# Altium PCB CONTROLER.PcbDoc
Units mm, origin at the board's own origin, x right, y up, seen from the top; angles counter-clockwise.
Board outline 82.3 x 80.9 mm, 2 copper layers (Top Layer, Bottom Layer); 48 components, 51 nets, 196 pads, 56 vias.
Unrouted connection lines stored in the file: 1.
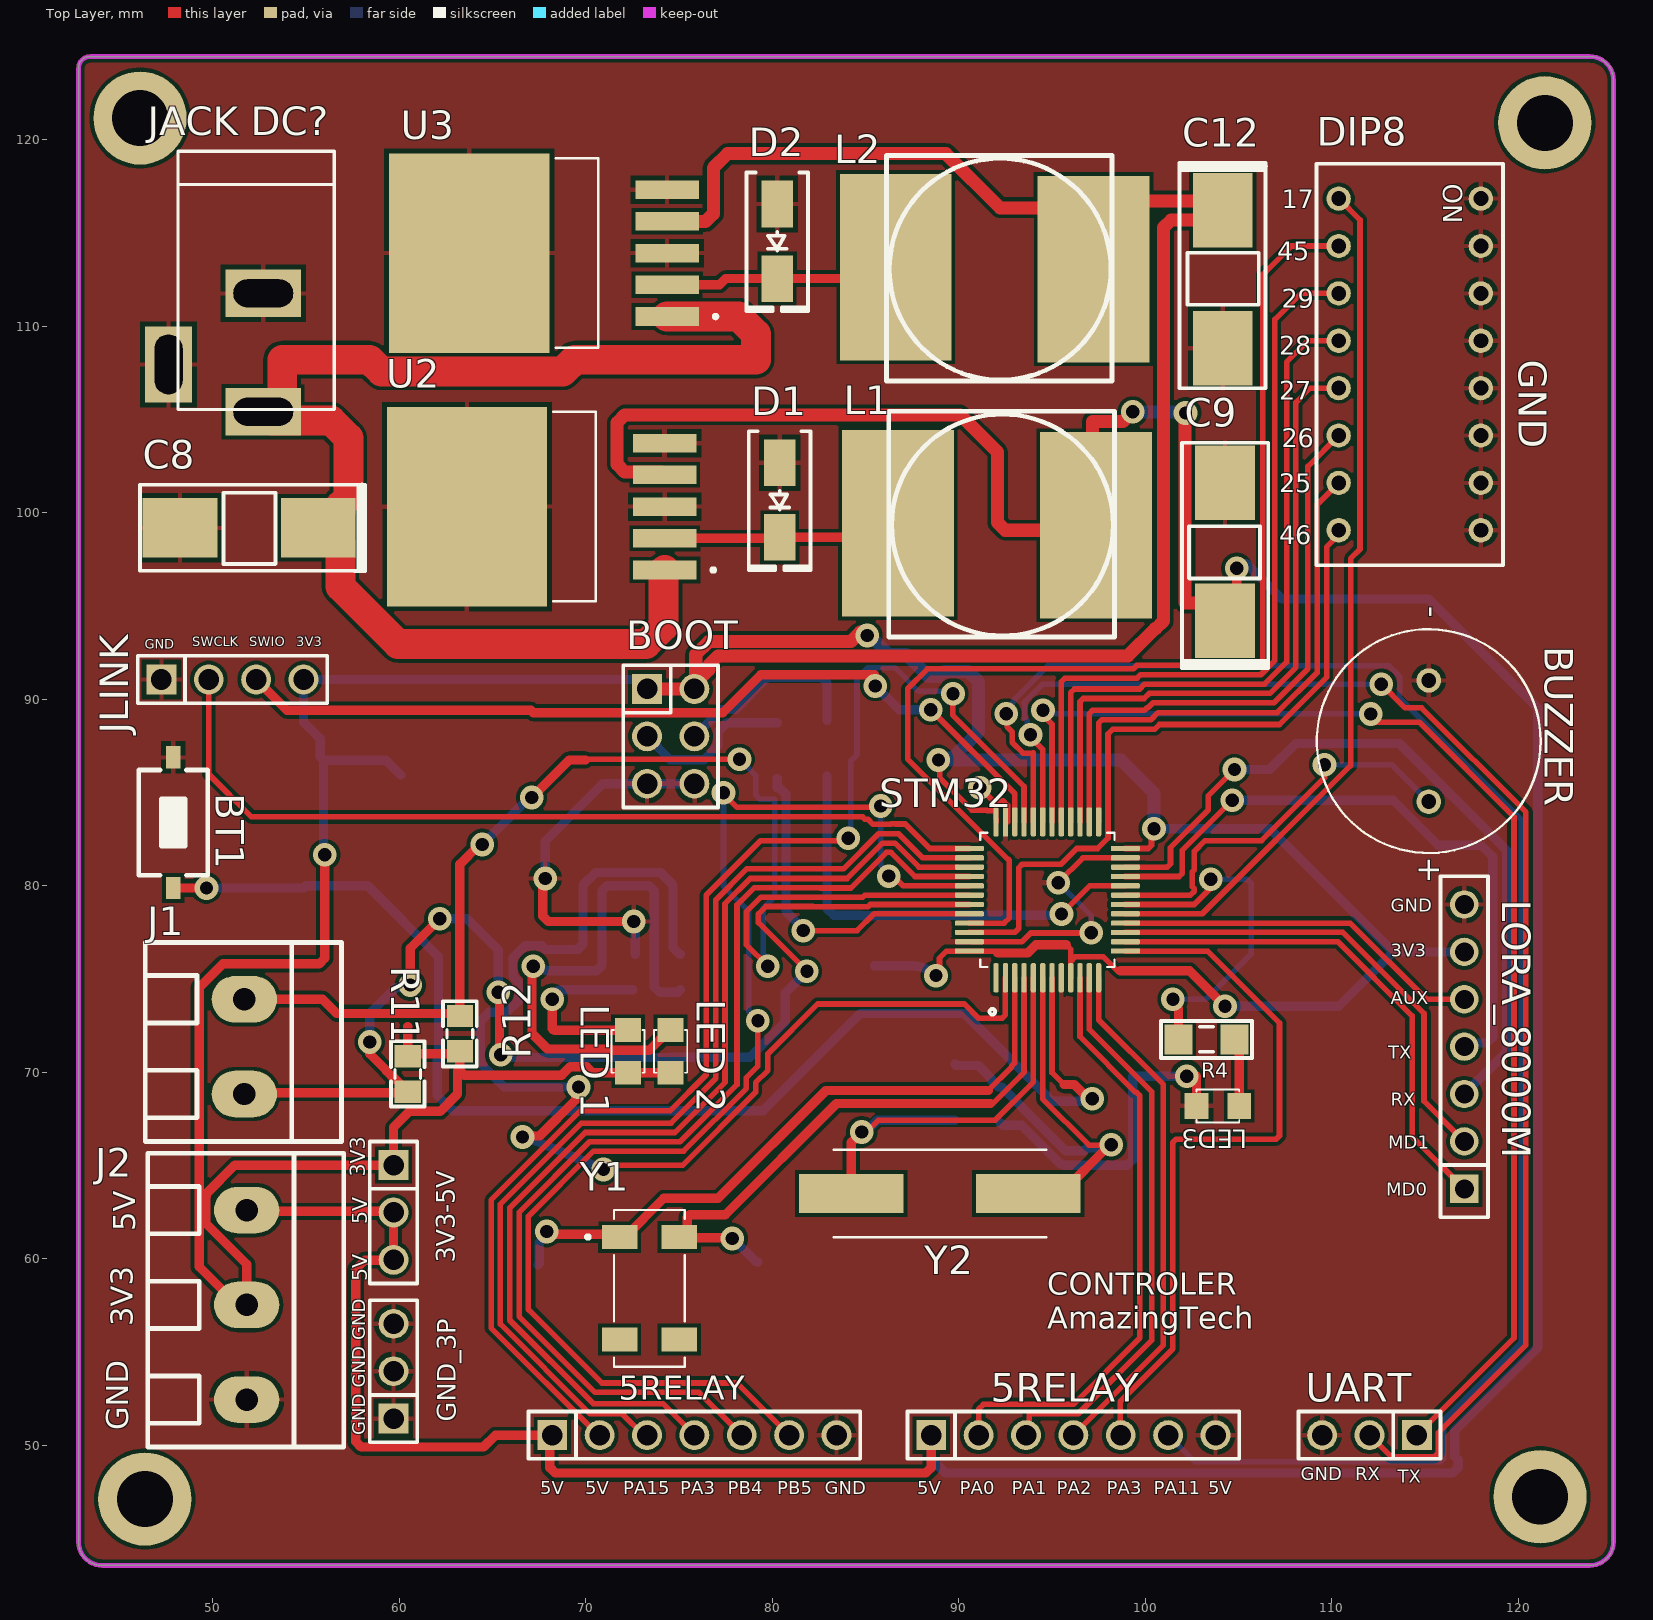
[diagram p0: Top Layer view]
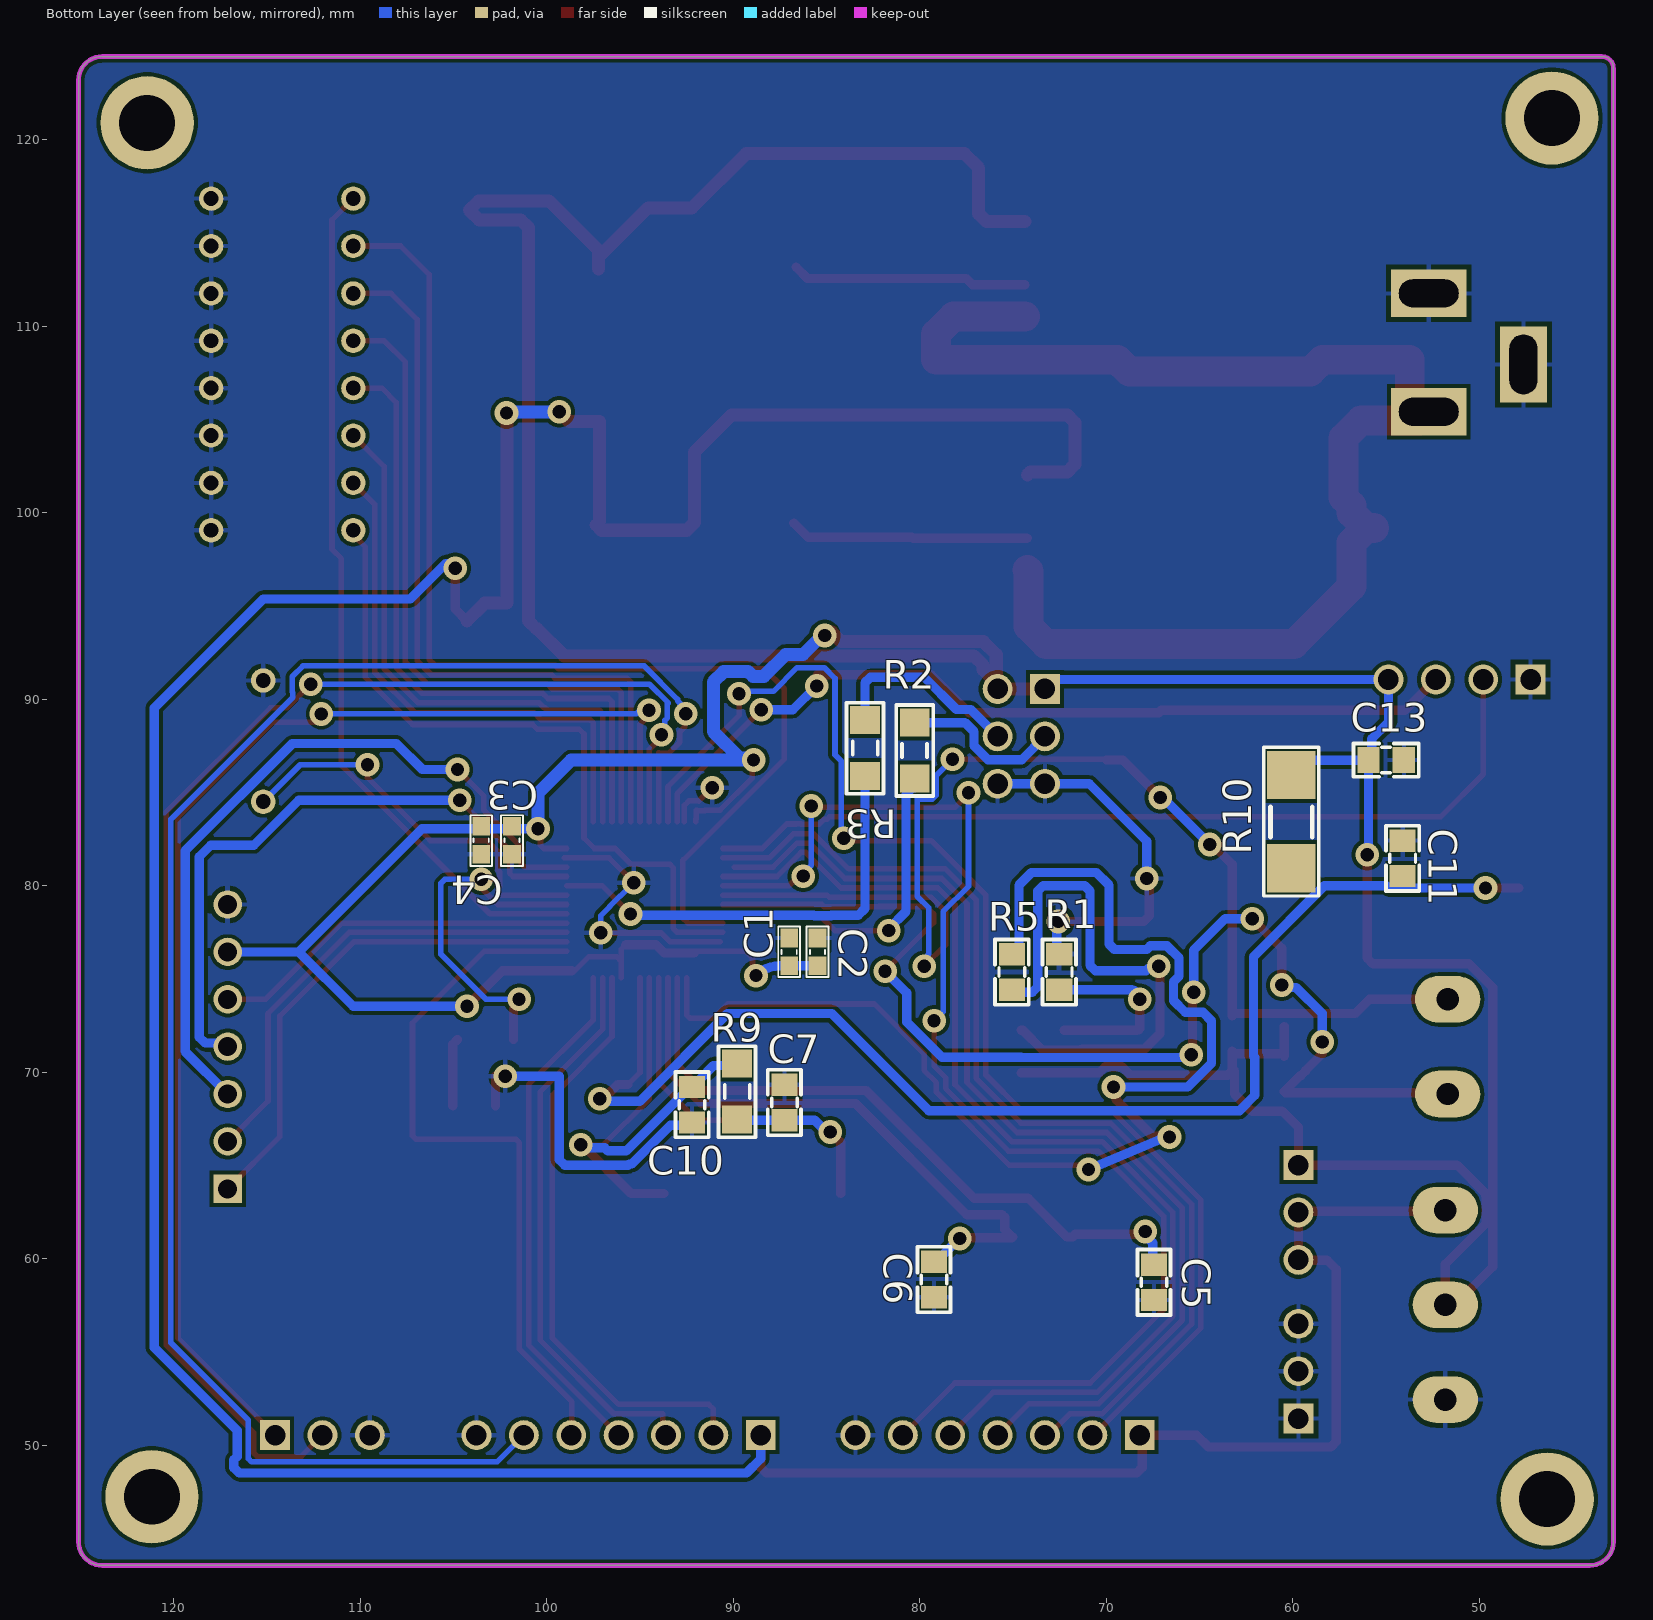
[diagram p1: Bottom Layer view, seen from below]

## Layer stack, top to bottom
Top Solder: solder mask 0.0102, Solder Resist, Dk 3.5
Top Layer: signal copper 0.0356
Dielectric 1: dielectric 0.32, FR-4, Dk 4.8
Bottom Layer: signal copper 0.0356
Bottom Solder: solder mask 0.0102, Solder Resist, Dk 3.5

## Board outline
42.799,44.831 42.799,123.825 cw(c43.434,123.825) 43.434,124.46 123.825,124.46 cw(c123.825,123.19) 125.095,123.19 125.095,44.831 cw(c123.825,44.831) 123.825,43.561 44.069,43.561 cw(c44.069,44.831)

## Design rules (kind name [scope] priority, off if disabled: settings)
Clearance [All] p1: gap=0.2 ignorepadtopadclearanceinfootprint=FALSE
PolygonConnect [All] p1: connectstyle=Relief reliefconductorwidth=0.254 reliefentries=4 polygonreliefangle="90 Angle" airgapwidth=0.254
RoutingVias [All] p1: holewidth=0.711 width=1.27 viastyle="Through Hole" minholewidth=0.711 minwidth=1.27 maxholewidth=0.711 maxwidth=1.27
SolderMaskExpansion [All] p1: expansion=0.102 istentingtop=FALSE
Width [All] p1: maxlimit=1.6 minlimit=0.3 preferedwidth=0.5
30 further rules are at their usual default settings.

## Components (designator, comment, footprint, x,y, rotation, side; value= is the part's Value field where it differs from the comment)
3V3-5V "3V3-5V" "JP 1x3 DT" 59.69,65.024 r270 top
5RELAY "5_RELAY" "JP 1x7 DT" 88.519,50.546 r0 top (schematic designator JP?)
5RELAY "5_RELAY" "JP 1x7 DT" 68.199,50.546 r0 top (schematic designator JP?)
BOOT "Header 3X2" "JP 2x3 DT" 74.549,88.011 r270 top (schematic designator P1)
BT1 "Nut Nhan 2 Chan SMD 3x6x2.5" "Nut Nhan 2 Chan SMD 3x6x2.5" 47.879,83.383 r270 top
BUZZER "BUZZER" CUI_CEM-1203(42) 115.189,87.757 r90 top (schematic designator LS1)
C1 "100nF" "tu 0603" 86.995,76.454 r90 bottom
C2 "100nF" "tu 0603" 85.471,76.454 r90 bottom
C3 "100nF" "tu 0603" 101.854,82.435 r270 bottom
C4 "100nF" "tu 0603" 103.505,82.435 r270 bottom
C5 "20pF" "tu 0805" 67.434,58.744 r270 bottom
C6 "20pF" "tu 0805" 79.228,58.888 r270 bottom
C7 "20pF" "tu 0805" 87.252,68.383 r90 bottom
C8 "100uF" "tu tantalum smd7343" 51.943,99.187 r180 top
C9 "100uF" "tu tantalum smd7343" 104.267,97.9 r90 top
C10 "20pF" "tu 0805" 92.199,68.264 r270 bottom
C11 "20pF" "tu 0805" 54.105,81.469 r90 bottom
C12 "100uF" "tu tantalum smd7343" 104.14,112.522 r270 top
C13 "20pF" "tu 0805" 54.991,86.741 r180 bottom
D1 "SS34" "DIODE SMA" 80.391,100.679 r270 top
D2 "SS34" "DIODE SMA" 80.264,114.554 r270 top
DIP8 "418117270908" 418117270908 114.173,107.95 r270 top (schematic designator SW1)
GND_3P "GND" "JP 1x3 DT" 59.69,51.435 r90 top
J1 "KF128-2P" KF128-5.08-2P 51.689,73.914 r270 top
J2 "KF128-3P" KF128-5.08-3P 51.816,62.611 r270 top
"JACK DC?" "JACK DC 5.5" "JACK DC 5.5" 50.165,108.585 r270 top value="Jac DC"
JLINK "SWD" "JP 1x4 DT" 47.244,91.059 r0 top (schematic designator P2)
L1 "100uH - 3A SMD" "Cuon Cam 12x12x10" 98.341,93.341 r90 top
L2 "100uH - 3A SMD" "Cuon Cam 12x12x10" 98.214,107.057 r90 top
LED3 "LED 3mm" LED-0805-Red 105.029,68.199 r180 top (schematic designator "LED 3")
"LED 1" "LED 3mm" LED-0805-Red 72.263,69.977 r90 top
"LED 2" "LED 3mm" LED-0805-Green 74.549,69.977 r90 top
LORA_8000M "LORA 8000M" "JP 1x7 CT" 117.094,63.754 r90 top (schematic designator JP?)
R1 "510k" "Tro SMD 0805" 72.578,75.373 r90 bottom
R2 "100K" "tro smd 1206" 80.264,87.249 r90 bottom
R3 "100K" "tro smd 1206" 82.931,87.376 r270 bottom
R4 "200R" "tro smd 1206" 103.275,71.755 r0 top
R5 "510k" "Tro SMD 0805" 75.118,75.373 r90 bottom
R9 "1M" "tro smd 1206" 89.789,68.961 r270 bottom
R10 "10k" "tro smd 2010" 60.071,83.439 r90 bottom
R11 "1.5k" "tro smd 0805" 60.513,69.92 r270 top
R12 "1.5k" "tro smd 0805" 63.185,72.066 r90 top
STM32 "STM32F103C8T6" QFP50P900X900X160-48N 94.742,79.248 r90 top (schematic designator U1)
U2 "LM2576S-5.0" VREG_TPS79625KTTR 63.627,100.33 r180 top
U3 "LM2576S-3.3/NOPB" VREG_TPS79625KTTR 63.754,113.919 r180 top
UART "UART" "JP 1x3 DT" 114.554,50.546 r180 top
Y1 "32.768KHZ-TR" XTAL_ABS25-32.768KHZ-TR 73.406,58.42 r0 top
Y2 "8.000MHZ" XTAL_ABLS-8.000MHZ-B4-T 88.976,63.5 r180 top

## Footprints (in the part's own frame and the unit in brackets; to place one, negate y for a bottom-side part, rotate by r counter-clockwise, add the part's x,y. Pads: shape width x height; smd on the part's side, far side on the other; paste and mask are expansions set on the pad)
418117270908 [mm] "2.54 mm compact THT with raised actuator, 8p"
  round 1.3 hole 0.8: 1(-8.89,-3.81) 2(-6.35,-3.81) 3(-3.81,-3.81) 4(-1.27,-3.81) 5(1.27,-3.81) 6(3.81,-3.81) 7(6.35,-3.81) 8(8.89,-3.81) 9(8.89,3.81) 10(6.35,3.81) 11(3.81,3.81) 12(1.27,3.81) 13(-1.27,3.81) 14(-3.81,3.81) 15(-6.35,3.81) 16(-8.89,3.81)
  silkscreen extent -10.76,-5 10.76,5, body extent -10.66,-4.95 10.66,4.95, height 6.9
CUI_CEM-1203(42) [mm]
  round 1.308 hole 0.8: N(3.25,0) P(-3.25,0)
  silkscreen extent -6,-6 6,6, body extent -6,-6 6,6, height 8.5
"Cuon Cam 12x12x10" [mm] "Cuon Cam 12x12x10"
  rect 10x6 smd: 1(6.1,11.6) 2(6,1)
  silkscreen extent 0,0 12.1,12.1, body extent 0.1,-0.2 12.1,12.14, height 7.51
"DIODE SMA" [mm] "SMA"
  rect 2.5x1.7 smd: 1(-2,0) 2(2,0)
  silkscreen extent -3.68,-1.65 3.75,1.65, body extent -2.6,-1.37 2.6,1.37, height 2.4
"JACK DC 5.5" [mm] "Jac DC input"
  rect 2.54x4.064 hole 1.5 slot 3.2 at 90 deg: 1(3.175,2.54) 2(-3.175,2.54)
  rect 4.064x2.54 hole 1.5 slot 3.2 at 0 deg: 3(0.635,-2.54)
  silkscreen extent -10.8,-2.03 3.05,6.35, body extent -10.42,-2.67 3.4,6.84, height 11.02
"JP 1x3 DT" [mm]
  rect 1.6x1.6 hole 1.1: 1(0,0)
  round 1.6 hole 1.1: 2(2.54,0) 3(5.08,0)
  silkscreen extent -1.27,-1.27 6.35,1.27, body extent -1.27,-1.27 6.35,1.27, height 8.54
"JP 1x4 DT" [mm] "4 pins, 1 row, straight, gold plating"
  rect 1.6x1.6 hole 1.1: 1(0,0)
  round 1.6 hole 1.1: 2(2.54,0) 3(5.08,0) 4(7.62,0)
  silkscreen extent -1.27,-1.27 8.89,1.27, body extent -1.27,-1.27 8.89,1.27, height 8.54
"JP 1x7 CT" [mm] "7 row, straight, gold plating"
  rect 1.52x1.52 hole 1.02: 1(0,0)
  round 1.52 hole 1.02: 2(2.54,0) 3(5.08,0) 4(7.62,0) 5(10.16,0) 6(12.7,0) 7(15.24,0)
  silkscreen extent -1.52,-1.27 16.76,1.27, body extent -1.52,-1.25 16.76,1.25, height 8.51
"JP 1x7 DT" [mm] "7 pins, 1 row, straight, gold plating"
  rect 1.6x1.6 hole 1.1: 1(0,0)
  round 1.6 hole 1.1: 2(2.54,0) 3(5.08,0) 4(7.62,0) 5(10.16,0) 6(12.7,0) 7(15.24,0)
  silkscreen extent -1.27,-1.27 16.51,1.27, body extent -1.27,-1.27 16.51,1.27, height 8.54
"JP 2x3 DT" [mm]
  rect 1.6x1.6 hole 1.1: 1(-2.54,-1.27)
  round 1.6 hole 1.1: 2(0,-1.27) 3(2.54,-1.27) 4(2.54,1.27) 5(0,1.27) 6(-2.54,1.27)
  silkscreen extent -3.81,-2.54 3.81,2.54, body extent -3.81,-2.54 3.81,2.54, height 8.55
KF128-5.08-2P [mm] "ÂƯ¶¤Ê½½ÓÏß¶Ë×Ó£¬½Å¾à5.08mm"
  oval 2.5x3.5 hole 1.2: 1(0,0) 2(5.08,0)
  silkscreen extent -3.05,-5.31 7.62,5.21, body extent -3.05,-5.38 7.61,5.12, height 14.15
KF128-5.08-3P [mm] "ÂƯ¶¤Ê½½ÓÏß¶Ë×Ó£¬½Å¾à5.08mm"
  oval 2.5x3.5 hole 1.2: 1(0,0) 2(5.08,0) 3(10.16,0)
  silkscreen extent -3.05,-5.31 12.7,5.21, body extent -3.05,-5.38 12.69,5.12, height 14.15
LED-0805-Green [mil]
  rect 50x55 smd: 1(0,0) 2(90,0)
  silkscreen extent 0,-35 90,35, body extent 5,-25 85,25, height 43
LED-0805-Red [mil]
  rect 50x55 smd: 1(0,0) 2(90,0)
  silkscreen extent 0,-35 90,35, body extent 5,-25 85,25, height 43
"Nut Nhan 2 Chan SMD 3x6x2.5" [mm] "Switch SMD type"
  rect 1.2x0.8 smd: 1(-3.5,0) 2(3.5,0)
  silkscreen extent -2.82,-1.85 2.82,1.85, body extent -3.05,-1.85 3.05,1.85, height 2.5
QFP50P900X900X160-48N [mm]
  rrect50% 1.56x0.28 smd: 1(-4.18,2.75) 2(-4.18,2.25) 3(-4.18,1.75) 4(-4.18,1.25) 5(-4.18,0.75) 6(-4.18,0.25) 7(-4.18,-0.25) 8(-4.18,-0.75) 9(-4.18,-1.25) 10(-4.18,-1.75) 11(-4.18,-2.25) 12(-4.18,-2.75) 25(4.18,-2.75) 26(4.18,-2.25) 27(4.18,-1.75) 28(4.18,-1.25) 29(4.18,-0.75) 30(4.18,-0.25) 31(4.18,0.25) 32(4.18,0.75) 33(4.18,1.25) 34(4.18,1.75) 36(4.18,2.75) ""(4.18,2.25)
  rrect50% 0.28x1.56 smd: 13(-2.75,-4.18) 14(-2.25,-4.18) 15(-1.75,-4.18) 16(-1.25,-4.18) 17(-0.75,-4.18) 18(-0.25,-4.18) 19(0.25,-4.18) 20(0.75,-4.18) 21(1.25,-4.18) 22(1.75,-4.18) 23(2.25,-4.18) 24(2.75,-4.18) 37(2.75,4.18) 38(2.25,4.18) 39(1.75,4.18) 40(1.25,4.18) 41(0.75,4.18) 42(0.25,4.18) 43(-0.25,4.18) 44(-0.75,4.18) 45(-1.25,4.18) 46(-1.75,4.18) 47(-2.25,4.18) 48(-2.75,4.18)
  silkscreen extent -6.15,-3.6 3.6,3.6, body extent -4.5,-4.5 4.5,4.5, height 1.6
"Tro SMD 0805" [mm]
  rect 1.2x1.4 smd: 1(-0.946,-0.061) 2(0.954,-0.061)
  silkscreen extent -1.75,-0.97 1.75,0.84, body extent -1.56,-0.76 1.44,0.64, height 0.53
"tro smd 0805" [mm]
  rect 1.2x1.4 smd: 1(-0.946,-0.061) 2(0.954,-0.061)
  silkscreen extent -1.75,-0.97 1.75,0.84, body extent -1.56,-0.76 1.44,0.64, height 0.53
"tro smd 1206" [mm]
  rect 1.5x1.6 smd: 1(-1.5,0) 2(1.5,0)
  silkscreen extent -2.44,-0.99 2.44,0.99, body extent -1.6,-0.8 1.6,0.8, height 0.6
"tro smd 2010" [mm]
  rect 2.6x2.6 smd: 1(-2.5,0) 2(2.5,0)
  silkscreen extent -3.99,-1.47 3.99,1.47, body extent -2.5,-1.25 2.5,1.25, height 0.59
"tu 0603" [mm] "Chip Capacitor, 2-Leads, Body 1,60x0,80mm, IPC Medium Density"
  rect 1x0.95 smd mask+0.076: 1(-0.75,0) 2(0.75,0)
  silkscreen extent -1.35,-0.58 1.37,0.58, body extent -0.8,-0.4 0.8,0.4, height 0.9
"tu 0805" [mm] "Compoment SMD 80x50mil"
  rect 1.2x1.4 smd: 1(-0.946,-0.003) 2(0.954,-0.003)
  silkscreen extent -1.75,-0.89 1.75,0.89, body extent -1.01,-0.64 1.01,0.63, height 0.61
"tu tantalum smd7343" [mm]
  rect 4x3.2 smd: 1(-3.7,0) 2(3.7,0)
  silkscreen extent -6.23,-2.31 5.85,2.31, body extent -3.75,-2.33 3.85,2.27, height 3.99
VREG_TPS79625KTTR [mm]
  rect 3.4x1 smd paste-3 mask+0: 1(-10.6,3.4) 2(-10.6,1.7) 3(-10.6,0) 4(-10.6,-1.7) 5(-10.6,-3.4)
  rect 8.6x10.7 smd paste-6 mask+0: 6(0,0)
  silkscreen extent -13.3,-5.08 -4.62,5.08
XTAL_ABLS-8.000MHZ-B4-T [mm]
  rect 5.6x2.1 smd: 1(-4.75,0) 2(4.75,0)
  silkscreen extent -5.7,-2.35 5.7,2.35, body extent -6.35,-2.35 6.35,2.35, height 4.06
XTAL_ABS25-32.768KHZ-TR [mm]
  rect 1.9x1.3 smd: 1(-1.6,2.75) 2(-1.6,-2.75) 3(1.6,-2.75) 4(1.6,2.75)
  silkscreen extent -3.4,-4.2 1.9,4.2, body extent -4,-1.25 4,1.41, height 2

## Part data
3V3-5V GND_3P UART: library part "JP 1x3 2.54 Duc Thang", "Cắm", Chung_Loai=Cắm, Don_Vi=Con, Ma_Hang=MH000903, Ten_Linh_Kien="Jump Đơn Đực 2.54MM 1x40P Thẳng 11MM"
5RELAY 5RELAY: library part "JP 1x7 2.54 Duc Thang", "Cắm", Chung_Loai=Cắm, Don_Vi=Con, Ma_Hang=MH000903, Ten_Linh_Kien="Jump Đơn Đực 2.54MM 1x40P Thẳng 11MM"
BOOT: library part "JP 2x3 2.54 Duc Thang", "Cắm", Chung_Loai=Cắm, Don_Vi=Con, Ma_Hang=MH002686, Ten_Linh_Kien="Jump Đôi Đực 2.54MM 2x40P Thẳng 11MM"
BUZZER: library part CEM-1203(42), "12 mm, 3.5 V, 85 dB, Through Hole, Magnetic Audio Transducer Buzzer", Package=None, Availability="In Stock", Check_prices=https://www.snapeda.com/parts/CEM-1203(42)/CUI+Devices/view-part/?ref=eda, CUI_purchase_URL=https://www.cuidevices.com/product/audio/buzzers/audio-transducers/cem-1203(42)?utm_source=snapeda.com&utm_medium=referral&utm_campaign=snapedaBOM, MF="CUI Devices", MP=CEM-1203(42), Price=None, Purchase-URL=https://pricing.snapeda.com/search/part/CEM-1203(42)/?ref=eda, SnapEDA_Link=https://www.snapeda.com/parts/CEM-1203(42)/CUI+Devices/view-part/?ref=snap
C1 C2 C3 C4: library part "Tu 0603 104 50V 10%", "Dán", Chung_Loai=Dán, Don_Vi=Con, Ma_Hang=MH004568, So_Chan=2, Ten_Linh_Kien="Tụ 0603 104-100nF 10% 50V"
C5 C6 C7 C10 C11 C13: library part "Tu 0805 20pF 50V 10%", "Dán", Chung_Loai=Dán, Don_Vi=Con, Ma_Hang=MH004558, So_Chan=2, Ten_Linh_Kien="Tụ 0805 20P 10% 50V"
C8 C9 C12: library part "Tu tantalum 100uF 25V SMD7343", "Dán", Chung_Loai=Dán, Don_Vi=Con, Ma_Hang=MH002347, So_Chan=2, Ten_Linh_Kien="Tụ tantalum 107E-100uF 25V SMD7343"
D1 D2: library part "Diode SS34 ( 1N5822 )", "Dán", Chung_Loai=Dán, Don_Vi=Con, Ma_Hang=MH002104, Ten_Linh_Kien="Diode SS34 3A 40V SMA ( 1N5822 SS34A)"
DIP8: library part 418117170908, "WS-DITV Compact THT Dip Switch, Flat Actuator, pitch 2.54mm, 8p", Manufacturer="Wurth Elektronik", Operating Temperature Max=85°C, Operating Temperature Min=-40°C, Rated Current Non-Switching=100mA, Rated Current Switching=25mA, Rated Voltage Non-Switching=50VDC, Rated Voltage Switching=24VDC, Actuator Type="Flat Type", Category="Dip Switches", ComponentLink1Description="Website Link", ComponentLink1URL=https://www.we-online.com/redexpert/article/418117170908?ad, ComponentLink2Description="Datasheet Link", ComponentLink2URL=https://www.we-online.com/redexpert/spec/418117170908?ad, Contact Material="Copper Alloy", Contact Plating=Gold, Manufacturer Part Number=418117170908, Match Code=WS-DITV, Mount="Through Hole", Number of Poles=8, Operation Force=800g, Packaging=Tube, Pitch=2.54mm
JLINK: library part "JP 1x4 2.54 Duc Thang", "Cắm", Chung_Loai=Cắm, Don_Vi=Con, Ma_Hang=MH000903, Ten_Linh_Kien="Jump Đơn Đực 2.54MM 1x40P Thẳng 11MM"
L1 L2: library part "CUON CAM 100uH SMD", "Dán", Chung_Loai=Dán, Don_Vi=Con, Ten_Linh_Kien="Cuộn Cảm 100uH 7x7x4MM CD74"
LED3 "LED 1": library part "LED 0805 Do", "Dán", Chung_Loai=Dán, Don_Vi=Con, Ma_Hang=MH000897, Ten_Linh_Kien="LED 0805 Màu Đỏ (Red)"
"LED 2": library part "LED 0805 Xanh La", "Dán", Chung_Loai=Dán, Don_Vi=Con, Ma_Hang=MH002326, Ten_Linh_Kien="LED 0805 Màu Xanh Lá (Green)"
LORA_8000M: library part "JP 1x7 2.54 Cai Thang", "Cắm", Chung_Loai=Cắm, Don_Vi=Con, Ma_Hang=MH004006, Ten_Linh_Kien="Jump Đơn Cái 2.54MM 1x20P Thẳng"
R1 R5: library part "Tro 0805 5% 510k", "Dán", Chung_Loai=Dán, Don_Vi=Con, Ma_Hang=MH007566, So_Chan=2, Ten_Linh_Kien="Trở 0805 5% 510k"
R2 R3: library part "Tro 1206 5% 100K", "Dán", Chung_Loai=Dán, Don_Vi=Con, Ma_Hang=MH005921, So_Chan=2, Ten_Linh_Kien="Trở 1206 5% 100k"
R4: library part "Tro 1206 1% 200R", "Dán", Chung_Loai=Dán, Don_Vi=Con, Ma_Hang=MH005895, So_Chan=2, Ten_Linh_Kien="Trở 1206 1% 200R"
R9: library part "Tro 1206 1% 1M", "Dán", Chung_Loai=Dán, Don_Vi=Con, Ma_Hang=MH005881, So_Chan=2, Ten_Linh_Kien="Trở 1206 1% 1M"
R10: library part "Tro 2010 5% 10k", "Dán", Chung_Loai=Dán, Don_Vi=Con, Ma_Hang=MH005617, So_Chan=2, Ten_Linh_Kien="Trở 2010 5% 103-10k"
R11 R12: library part "Tro 0805 5% 1.5k", "Dán", Chung_Loai=Dán, Don_Vi=Con, Ma_Hang=MH005232, So_Chan=2, Ten_Linh_Kien="Trở 0805 5% 1.5k"
STM32: "ARM® Cortex®-M3 STM32F1 Microcontroller IC 32-Bit 72MHz 64KB (64K x 8) FLASH 48-LQFP (7x7)", Package="LQFP-48 STMicroelectronics", Check_prices=https://www.snapeda.com/parts/STM32F103C8T6/STMicroelectronics/view-part/?ref=eda, MF=STMicroelectronics, MP=STM32F103C8T6, SnapEDA_Link=https://www.snapeda.com/parts/STM32F103C8T6/STMicroelectronics/view-part/?ref=snap
U2: "SIMPLE SWITCHER&#174; 40V, 3A Low Component Count Step-Down Regulator", Package="TO-263-5 Texas Instruments", Availability=Unavailable, DigiKey-Purchase-URL=https://snapeda.com/shop?store=DigiKey&id=227071, MF="Texas Instruments", Mouser-Purchase-URL=https://snapeda.com/shop?store=Mouser&id=227071, MP=LM2576S-5.0/NOPB, Price=None, SnapEDA_Link=https://www.snapeda.com/parts/LM2576S-5.0/NOPB/Texas%20Instruments/view-part/227071/?ref=snap, Texas_Instruments-Purchase-URL=https://snapeda.com/shop?store=Texas+Instruments&id=227071
U3: "SWITCHER Ø³Ø§Ø¯Ù‡ Ùˆ regØ› 40 ÙˆÙ„Øª ØŒ 3A ØªÙ†Ø¸ÛŒÙ… Ú©Ù†Ù†Ø¯Ù‡ Ú¯Ø§Ù… Ø¨Ù‡ Ù¾Ø§ÛŒÛŒÙ† ØªØ¹Ø¯Ø§Ø¯ Ú©Ø§Ù…Ù¾ÙˆÙ†Ù†Øª Ú©Ù… 5-DDPAK / TO-263 -40 ØªØ§ 125", Package="TO-263-5 Texas Instruments", Availability=Unavailable, MF="Texas Instruments", MP=LM2576S-3.3/NOPB, Price=None, SnapEDA_Link=https://www.snapeda.com/parts/LM2576S-3.3/NOPB/Texas%20Instruments/view-part/214965/?ref=snap, Texas_Instruments-Purchase-URL=https://snapeda.com/shop?store=Texas+Instruments&id=214965
Y1: library part ABS25-32.768KHZ-TR, "Crystal 0.032768MHz Â±20ppm (Tol) 12.5pF FUND 50000Ohm 4-Pin SMD T/R", Package=Package, Check_prices=https://www.snapeda.com/parts/ABS25-32.768KHZ-TR/Abracon/view-part/?ref=eda, MF="Abracon Corporation", MP=ABS25-32.768KHZ-TR, SnapEDA_Link=https://www.snapeda.com/parts/ABS25-32.768KHZ-TR/Abracon/view-part/?ref=snap
Y2: library part ABLS-8.000MHZ-B4-T, "HC/49US (AT49) SMD LOW PROFILE CRYSTAL", Package=None, Check_prices=https://www.snapeda.com/parts/ABLS-8.000MHZ-B4-T/Abracon+LLC/view-part/?ref=eda, Digi-Key_Part_Number=535-10212-2-ND, MF="Abracon LLC", MP=ABLS-8.000MHZ-B4-T, Purchase-URL=https://pricing.snapeda.com/search/part/ABLS-8.000MHZ-B4-T/?ref=eda, SnapEDA_Link=https://www.snapeda.com/parts/ABLS-8.000MHZ-B4-T/Abracon+LLC/view-part/?ref=snap
BT1: Ma_Hang=MH001036, Ten="Nút Nhấn 2 Chân 3x6x2.5MM SMD"

## Free pads (board coordinates)
  round 5 hole 3: 2(46.101,121.158) 2(46.355,47.117) 2(121.158,47.244) 2(121.412,120.904)

## Via types
v1: diameter 1.27, hole 0.711, Top Layer to Bottom Layer, 56 vias

## Nets (pads, with @x,y where several pads share a name; then routed paths per layer and width w, separated by ;. In a path a pad name is that pad's centre, name@x,y a point inside that pad or via, vN(x,y) a via of type N, cw(c..) or ccw(c..) an arc to the next point about the centre after c; other vN are vias at no path point)
3V3: 3V3-5V.1 "LED 1.1" "LED 2.1" BOOT.1 BOOT.6 C1.1 C2.1 C3.1 C4.1 C12.1 C13.1 J2.2 JLINK.4 L2.2 LORA_8000M.6 R10.2 R11.1 R12.1 STM32.9 STM32.24 STM32.36 STM32.48 U3.4 | length 296.7
  Top Layer w0.3: v1(88.773,75.184) 88.959,75.37 88.959,76.125 89.332,76.498 STM32.48 91.975,76.498 92.075,76.398 ; v1(88.9,86.741) 88.964,86.677 88.964,85.789 90.695,84.058 91.49,84.058 91.516,84.033 91.93,84.033 91.955,84.058 91.982,84.058 91.982,83.566 91.992,83.556 STM32.36 ; 95.758,76.835 95.992,76.601 95.992,75.952 ; STM32.9 95.992,75.688 96.002,75.698 96.002,75.952 96.248,76.198 97.736,76.198 98.496,75.438 98.651,75.438 ; STM32.24 100.152,81.998 100.328,82.174 100.328,82.929 v1(100.457,83.058)
  Top Layer w0.5: v1(56.007,81.661) 56.007,76.112 55.714,75.819 50.546,75.819 49.276,74.549 49.276,59.571 51.316,57.531 J2.2 51.816,59.707 49.616,61.907 49.616,63.315 49.657,63.356 49.657,63.5 51.181,65.024 3V3-5V.1 59.69,67.056 60.55,67.916 62.201,67.916 63.119,68.834 63.119,70.088 ; 60.452,72.452 R11.1 60.579,70.993 63.119,70.993 R12.1 63.246,70.088 63.484,69.85 68.707,69.85 69.156,70.299 70.053,70.299 70.375,69.977 72.263,69.977 74.549,69.977 ; 92.075,76.398 93.698,76.398 94.135,76.835 95.758,76.835 ; 98.651,75.438 102.362,75.438 v1(104.265,73.535) ; v1(100.457,83.058) v1@100.457,83.266
  Top Layer w0.7: BOOT.1 BOOT.6 75.891,90.623 BOOT.6@75.891,90.867 ; U3.4 76.425,115.619 76.835,116.029 76.835,118.491 77.597,119.253 89.296,119.253 92.202,116.347 94.564,116.347 L2.2@97.214,113.697 ; v1(85.08,93.418) 84.899,93.599 84.709,93.599 84.201,93.091 76.581,93.091 75.891,92.401 BOOT.6@75.891,90.867 ; L2.2 L2.2@97.214,113.697 ; BOOT.6@75.891,90.867 76.594,91.57 76.594,91.834 77.089,92.329 99.06,92.329 100.522,93.791 100.569,93.791 100.965,94.187 100.965,115.287 101.375,115.697 103.615,115.697 C12.1 103.649,116.713 99.864,116.713 97.214,114.063 L2.2@97.214,113.697
  Bottom Layer w0.5: v1(56.007,81.661) 55.937,81.731 C13.1 ; R10.2 59.272,86.738 C13.1 ; BOOT.1 72.771,91.059 JLINK.4 54.864,88.773 55.753,87.884 55.753,86.921 C13.1 ; C2.1 C1.1 87.518,75.704 cw(c87.518,73.929) v1(88.773,75.184) ; v1(100.457,83.058) 101.854,83.058 103.505,83.058 106.68,83.058 113.284,76.454 ; v1(104.265,73.535) 110.365,73.535 113.284,76.454 ; LORA_8000M.6 113.284,76.454
  Bottom Layer w0.7: v1(85.08,93.418) 85.234,93.418 86.252,92.4 87.178,92.4 88.353,91.225 88.933,91.225 89.192,91.483 90.508,91.483 91.059,90.932 91.059,88.265 89.644,86.85 89.009,86.85 v1(88.9,86.741) 98.679,86.741 100.457,84.963 v1(100.457,83.058)
5V: 3V3-5V.2 3V3-5V.3 5RELAY.1 C9.1 J2.1 L1.2 U2.4 | length 212.1
  Top Layer w0.5: J2.1 51.88,62.547 59.627,62.547 3V3-5V.2 3V3-5V.3 59.664,59.918 58.14,59.918 57.658,59.436 57.658,50.204 57.951,49.911 64.516,49.911 65.151,50.546 5RELAY.1@68.199,50.546 ; 5RELAY.1@68.453,50.8 5RELAY.1@68.199,50.546 ; 5RELAY.1@88.519,50.546 88.519,48.807 88.226,48.514 68.365,48.514 68.072,48.807 68.072,50.419 5RELAY.1@68.199,50.546 ; C9.1 104.902,94.835 v1(104.902,97.028)
  Top Layer w0.7: U2.4 74.077,102.18 72.084,102.18 71.674,102.59 71.674,104.835 72.084,105.245 90.081,105.245 92.075,103.251 92.075,99.47 92.485,99.06 97.06,99.06 L1.2 97.155,99.527 97.155,104.902 98.806,104.902 v1(99.314,105.41) ; v1(102.15,105.351) 102.117,105.318 102.117,95.152 103.315,95.152 C9.1
  Bottom Layer w0.5: 5RELAY.1@88.519,50.546 88.519,49.276 89.281,48.514 116.475,48.514 116.768,48.807 116.768,49.221 116.586,49.403 116.586,50.8 121.031,55.245 121.031,89.535 115.189,95.377 107.315,95.377 105.41,97.282 105.156,97.282 v1(104.902,97.028)
  Bottom Layer w0.7: v1(99.314,105.41) 102.235,105.41 102.176,105.351 v1(102.15,105.351)
12V: "JACK DC?.1" C8.1 U2.1 U3.1 | length 72.4
  Top Layer w1.6: C8.1 C8.1@56.043,99.187 ; U2.1 74.168,96.871 74.168,93.901 73.231,92.964 59.929,92.964 56.843,96.05 56.843,98.387 C8.1@56.043,99.187 ; U3.1 78.184,110.519 79.121,109.582 79.121,108.204 69.398,108.204 68.763,107.569 59.04,107.569 58.405,108.204 53.721,108.204 53.721,105.88 53.251,105.41 52.705,105.41 53.175,104.94 56.34,104.94 57.277,104.003 57.277,100.821 56.843,100.387 56.843,99.987 C8.1@56.043,99.187
BOOT0: R2.1 STM32.44 | length 18.1
  Top Layer w0.3: v1(81.661,77.597) 84.547,77.597 85.448,78.498 STM32.44
  Bottom Layer w0.5: R2.1 80.264,85.249 80.381,85.249 80.732,84.898 80.732,78.627 81.661,77.698 v1(81.661,77.597)
BOOT1: R3.2 STM32.20 | length 23.9
  Top Layer w0.3: v1(95.504,78.486) 97.026,80.008 98.292,80.008 98.302,79.998 STM32.20
  Bottom Layer w0.5: R3.2 82.931,78.779 83.293,78.417 84.721,78.417 84.751,78.387 85.65,78.387 85.68,78.417 95.435,78.417 v1(95.504,78.486)
D0: DIP8.2 STM32.45 | length 61.9
  Top Layer w0.3: STM32.45 92.427,77.998 92.71,78.281 92.71,81.358 92.661,81.407 92.639,81.407 87.249,86.797 87.249,90.564 88.314,91.629 99.35,91.629 99.542,91.821 105.983,91.821 106.299,92.137 106.299,112.776 107.823,114.3 DIP8.2
GND: 5RELAY.7 "JACK DC?.2" "JACK DC?.3" BOOT.3 BOOT.4 BT1.1 BUZZER.N C1.2 C2.2 C3.2 C4.2 C5.2 C6.2 C7.2 C8.2 C9.2 C10.2 C11.2 C12.2 C13.2 D1.1 D2.1 DIP8.9 DIP8.10 DIP8.11 DIP8.12 DIP8.13 DIP8.14 DIP8.15 DIP8.16 GND_3P.1 GND_3P.2 GND_3P.3 J2.3 JLINK.1 LED3.2 LORA_8000M.7 R1.2 STM32. STM32.8 STM32.23 STM32.47 U2.3 U2.5 U2.6 U3.3 U3.5 U3.6 UART.3 | length 55.1
  Top Layer w0.3: STM32.47@90.689,76.998 93.381,76.998 93.853,77.47 97.083,77.47 v1(97.1,77.486) ; v1(91.124,85.258) 91.85,84.533 91.875,84.558 92.363,84.558 92.609,84.312 92.609,83.773 92.619,83.763 STM32.@92.619,83.428 ; v1(95.321,80.167) 96.652,81.498 STM32.23@99.049,81.498
  Top Layer w0.5: v1(67.818,80.391) 67.691,80.264 67.691,78.379 67.984,78.086 v1(72.567,78.086) ; v1(102.214,69.794) 102.743,69.794 LED3.2
  Bottom Layer w0.3: v1(95.321,80.167) 96.016,79.471 96.039,79.471 96.616,78.894 96.616,78.871 97.1,78.388 v1(97.1,77.486)
  Bottom Layer w0.5: v1(67.818,80.391) 67.818,82.384 70.905,85.471 BOOT.4@75.946,85.471 ; v1(72.567,78.086) 72.536,78.086 72.644,77.978 R1.2@72.644,76.327 ; C10.2 92.349,67.163 93.359,67.163 95.436,65.086 95.569,65.086 95.631,65.024 99.021,65.024 99.314,65.317 99.314,69.794 v1(102.214,69.794)
MISO: LORA_8000M.5 STM32.16 | length 19.9
  Top Layer w0.3: STM32.16 110.978,77.998 115.062,73.914 LORA_8000M.5
MOSI: DIP8.1 STM32.17 | length 46.4
  Top Layer w0.3: STM32.17 103.046,78.498 110.998,86.45 110.998,97.536 111.506,98.044 111.506,115.697 DIP8.1
NetD1_2: D1.2 L1.1 U2.2 | length 12.8
  Top Layer w0.5: U2.2 80.342,98.63 D1.2 85.979,98.679 L1.1
NetD2_2: D2.2 L2.1 U3.2 | length 12.6
  Top Layer w0.5: U3.2 77.167,112.219 77.502,112.554 D2.2 86.011,112.554 L2.1
"NetLED 1_2": "LED 1.2" R1.1 | length 10.3
  Top Layer w0.5: v1(68.199,73.914) 68.199,72.39 ccw(c68.326,72.39) 68.326,72.263 72.263,72.263
  Bottom Layer w0.5: v1(68.199,73.914) cw(c68.712,73.914) 68.712,74.427 R1.1
"NetLED 2_2": "LED 2.2" R5.1 | length 29.5
  Top Layer w0.5: v1(67.183,75.692) 67.114,75.623 67.114,72.078 67.945,71.247 71.309,71.247 71.378,71.178 73.401,71.178 74.486,72.263 74.549,72.263
  Bottom Layer w0.5: v1(67.183,75.692) 67.33,75.545 67.754,75.545 67.861,75.438 70.573,75.438 70.866,75.731 70.866,79.717 71.159,80.01 73.374,80.01 73.667,79.717 73.667,74.588 73.96,74.295 74.925,74.295 R5.1
"NetLED 3_1": LED3.1 R4.2 | length 3.7
  Top Layer w0.5: R4.2 105.029,71.501 LED3.1
NetP1_2: BOOT.2 R2.2 | length 8.8
  Bottom Layer w0.5: BOOT.2 74.529,86.761 76.337,86.761 77.089,87.513 77.089,88.265 77.573,88.749 R2.2
NetP1_5: BOOT.5 R3.1 | length 10.6
  Bottom Layer w0.5: BOOT.5 77.257,89.449 78.019,89.449 79.756,91.186 82.638,91.186 82.931,90.893 R3.1
NSS: LORA_8000M.1 STM32.14 | length 27.5
  Top Layer w0.3: STM32.14 110.327,76.998 114.3,73.025 114.3,66.548 LORA_8000M.1
OSCIN: C7.1 R9.2 STM32.5 Y2.2 | length 24.7
  Top Layer w0.3: v1(84.786,66.802) 85.049,66.802 85.684,67.437 91.948,67.437 93.992,69.481 STM32.5
  Top Layer w0.5: Y2.2 84.226,66.242 v1(84.786,66.802)
  Bottom Layer w0.5: v1(84.786,66.802) 84.995,66.802 85.63,67.437 C7.1 R9.2@89.789,67.437
OSCOUT: C10.1 R9.1 STM32.6 Y2.1 | length 27.2
  Top Layer w0.3: STM32.6 94.492,68.576 96.976,66.092 98.154,66.092 v1(98.171,66.109)
  Top Layer w0.5: Y2.1 95.476,63.5 98.085,66.109 v1(98.171,66.109)
  Bottom Layer w0.5: R9.1@89.789,70.437 89.86,70.366 91.046,70.366 91.752,69.66 91.752,69.56 92.102,69.21 92.302,69.21 95.726,65.786 96.709,65.786 96.884,65.962 98.024,65.962 v1(98.171,66.109)
PA0: 5RELAY.2@91.059,50.546 STM32.10 | length 32.3
  Top Layer w0.3: 5RELAY.2@91.059,50.546 91.059,51.943 91.313,52.197 96.139,52.197 99.695,55.753 99.695,68.749 99.519,68.925 99.477,68.925 96.492,71.91 STM32.10
PA1: 5RELAY.3@93.599,50.546 STM32.11 | length 30.2
  Top Layer w0.3: 5RELAY.3@93.599,50.546 93.775,50.722 93.775,51.696 96.4,51.696 100.33,55.626 100.33,68.961 96.992,72.299 STM32.11
PA2: 5RELAY.4@96.139,50.546 STM32.12 | length 28
  Top Layer w0.3: 5RELAY.4@96.139,50.546 100.965,55.372 100.965,69.342 97.492,72.815 STM32.12
PA3: 5RELAY.5@98.679,50.546 STM32.13 | length 38.6
  Top Layer w0.3: 5RELAY.5@98.679,50.546 98.652,50.573 98.652,52.351 101.465,55.165 101.465,66.237 101.649,66.421 107.012,66.421 107.188,66.597 107.188,72.644 103.334,76.498 STM32.13
PA8: DIP8.3 STM32.29 | length 41.7
  Top Layer w0.3: STM32.29 95.492,90.941 95.68,91.129 99.557,91.129 99.741,91.313 106.182,91.313 106.937,92.067 106.937,110.366 108.331,111.76 DIP8.3
PA9: STM32.30 UART.1 | length 69.5
  Top Layer w0.3: v1(94.507,89.409) 94.507,89.147 94.992,88.662 STM32.30 ; v1(112.086,89.212) 112.014,89.14 112.014,88.773 114.681,88.773 119.761,83.693 119.761,55.753 UART.1
  Bottom Layer w0.3: v1(94.507,89.409) 94.545,89.409 94.546,89.408 94.996,89.408 95.192,89.212 v1(112.086,89.212)
PA10: STM32.31 UART.2 | length 77.5
  Top Layer w0.3: v1(93.844,88.098) 93.844,87.966 94.492,87.317 STM32.31 ; UART.2 113.164,49.396 115.499,49.396 115.704,49.601 115.704,50.68 120.396,55.372 120.396,83.947 114.808,89.535 113.919,89.535 v1(112.649,90.805)
  Bottom Layer w0.3: v1(93.844,88.098) 93.658,88.283 93.658,88.865 93.522,89.001 93.522,89.739 93.472,89.789 94.488,90.805 v1(112.649,90.805)
PA11: 5RELAY.6@101.219,50.546 STM32.32 | length 91.2
  Top Layer w0.3: v1(92.537,89.224) 92.591,89.224 92.591,88.511 92.859,88.243 92.859,87.69 93.436,87.113 93.98,87.113 93.98,87.122 93.992,87.11 STM32.32
  Bottom Layer w0.3: v1(92.537,89.224) 92.537,89.487 92.972,89.922 92.972,89.996 94.766,91.79 113.057,91.79 113.634,91.213 113.634,90.393 113.599,90.358 113.599,90.109 120.142,83.566 120.142,55.499 115.986,51.343 115.986,49.29 115.81,49.114 102.651,49.114 5RELAY.6@101.219,50.546
PA12: 5RELAY.2@70.739,50.546 STM32.33 | length 71.1
  Top Layer w0.3: 5RELAY.2@70.739,50.546 70.667,50.546 64.921,56.292 64.921,63.143 69.723,67.945 74.532,67.945 76.454,69.867 76.454,79.502 79.375,82.423 83.938,82.423 v1(84.069,82.555) ; v1(89.683,90.298) 89.672,90.298 v1@89.662,90.288 ; STM32.33 93.492,85.324 89.662,89.154 v1@89.662,90.288 ; v1@89.662,90.288 89.662,90.297 89.645,90.28 89.645,90.271 v1@89.662,90.288
  Bottom Layer w0.3: v1(84.069,82.555) 84.201,82.686 84.201,86.691 84.535,87.024 84.535,91.123 85.112,91.7 86.565,91.7 87.843,90.422 89.559,90.422 v1(89.683,90.298)
PA15: 5RELAY.3@73.279,50.546 STM32.38 | length 56.3
  Top Layer w0.3: 5RELAY.3@73.279,50.546 73.08,50.546 71.93,51.696 70.612,51.696 70.605,51.689 70.231,51.689 65.421,56.499 65.421,62.936 69.759,67.274 74.568,67.274 76.962,69.668 76.962,79.248 78.621,80.907 83.815,80.907 85.695,82.787 86.771,82.787 88.06,81.498 STM32.38
PB0: R4.1 STM32.18 | length 18.9
  Top Layer w0.3: STM32.18 102.62,78.998 103.505,79.883 v1(103.505,80.35)
  Top Layer w0.5: v1(101.473,73.914) 101.473,73.706 101.775,73.404 R4.1
  Bottom Layer w0.3: v1(101.473,73.914) 103.251,73.914 105.664,76.327 105.664,80.137 105.451,80.35 v1(103.505,80.35)
PB1: BUZZER.P STM32.19 | length 21.7
  Top Layer w0.3: STM32.19 102.413,79.498 102.616,79.701 102.616,79.846 102.52,79.942 102.52,80.758 102.616,80.854 102.616,81.843 103.196,82.423 106.227,82.423 109.601,85.797 v1(109.601,86.487)
  Bottom Layer w0.3: v1(109.601,86.487) 113.209,86.487 BUZZER.P
PB3: 5RELAY.4@75.819,50.546 STM32.39 | length 56.7
  Top Layer w0.3: 5RELAY.4@75.819,50.546 74.132,52.233 70.394,52.233 65.921,56.706 65.921,62.729 69.966,66.774 74.775,66.774 77.462,69.461 77.462,79.041 78.812,80.391 84.006,80.391 85.902,82.287 86.564,82.287 87.853,80.998 STM32.39@89.932,80.998
PB4: 5RELAY.5@78.359,50.546 STM32.40 | length 58.5
  Top Layer w0.3: 5RELAY.5@78.359,50.546 76.064,52.841 70.494,52.841 66.421,56.913 66.421,62.492 70.203,66.274 75.037,66.274 78.105,69.342 78.105,78.977 79.019,79.891 82.589,79.891 82.597,79.883 84.205,79.883 86.109,81.787 86.357,81.787 87.646,80.498 STM32.40
PB5: 5RELAY.6@80.899,50.546 STM32.41 | length 70.5
  Top Layer w0.3: v1(77.382,84.99) 77.376,84.996 77.364,84.996 77.343,84.974 77.343,84.963 78.105,84.201 85.733,84.201 v1(85.805,84.273) ; v1(79.224,72.764) 79.224,70.334 78.605,69.715 78.605,69.135 75.244,65.774 70.41,65.774 66.921,62.285 66.921,57.285 70.865,53.341 78.104,53.341 5RELAY.6@80.899,50.546 ; v1(86.233,80.518) 86.495,80.518 87.015,79.998 STM32.41
  Bottom Layer w0.3: v1(77.382,84.99) 77.382,79.971 78.74,78.613 78.74,73.248 v1(79.224,72.764) ; v1(85.805,84.273) 85.805,81.1 86.233,80.673 v1(86.233,80.518)
PB9: DIP8.8 STM32.46 | length 38.1
  Top Layer w0.3: STM32.46 92.992,77.498 93.218,77.724 93.218,80.977 93.394,81.153 95.473,81.153 96.318,81.998 97.436,81.998 97.992,82.554 97.992,88.138 98.254,88.4 100.505,88.4 100.751,88.646 107.188,88.646 109.712,91.17 109.712,98.155 110.363,98.806 DIP8.8
PB12: DIP8.7 STM32.25 | length 28.8
  Top Layer w0.3: STM32.25 97.492,88.724 97.668,88.9 100.298,88.9 100.679,89.281 107.062,89.281 109.212,91.431 109.212,100.449 DIP8.7
PB13: DIP8.6 STM32.26 | length 31.7
  Top Layer w0.3: STM32.26 96.992,89.232 97.168,89.408 99.949,89.408 100.084,89.543 100.14,89.543 100.41,89.813 106.887,89.813 108.712,91.638 108.712,102.489 DIP8.6
PB14: DIP8.5 STM32.27 | length 35.6
  Top Layer w0.3: STM32.27 96.492,89.867 96.668,90.043 99.933,90.043 100.203,90.313 106.68,90.313 108.069,91.702 108.069,105.918 108.831,106.68 DIP8.5
PB15: DIP8.4 STM32.28 | length 38.5
  Top Layer w0.3: STM32.28 95.992,90.355 96.188,90.551 99.695,90.551 99.957,90.813 106.389,90.813 107.569,91.993 107.569,108.077 108.712,109.22 DIP8.4
PC13: R5.2 STM32.2 | length 67.4
  Top Layer w0.3: v1(70.946,64.789) 70.946,64.981 70.909,64.981 70.866,65.024 75.201,65.024 79.105,68.928 79.105,69.453 79.756,70.104 79.756,70.993 82.423,73.66 90.297,73.66 91.059,72.898 92.316,72.898 92.492,73.074 STM32.2
  Top Layer w0.5: v1(66.601,66.536) 66.649,66.583 67.513,66.583 69.457,68.528 69.457,69.066 v1(69.604,69.213)
  Bottom Layer w0.5: v1(66.601,66.536) 67.056,66.421 67.091,66.407 v1(70.946,64.789) ; v1(69.604,69.213) 65.623,69.213 64.351,70.486 64.351,72.756 64.809,73.214 65.757,73.214 66.393,73.849 66.393,74.848 66.098,75.143 66.098,76.141 66.734,76.777 67.632,76.777 67.828,76.581 69.557,76.581 69.85,76.874 69.85,80.036 70.524,80.71 74.002,80.71 74.676,80.036 74.676,76.677 75.026,76.327 R5.2
PC14: C5.1 STM32.3 Y1.1 | length 35.6
  Top Layer w0.3: 91.567,69.026 92.837,70.296 92.837,70.358 92.992,70.513 STM32.3
  Top Layer w0.5: v1(67.906,61.468) 68.053,61.321 71.655,61.321 Y1.1 72.106,61.17 74.182,63.246 77.089,63.246 82.869,69.026 91.567,69.026
  Bottom Layer w0.5: C5.1 67.501,59.753 67.501,60.854 67.906,61.26 v1(67.906,61.468)
PC15: C6.1 STM32.4 Y1.4 | length 32.4
  Top Layer w0.3: 91.694,68.326 91.821,68.326 93.492,69.997 STM32.4
  Top Layer w0.5: v1(77.851,61.087) 77.809,61.129 75.047,61.129 Y1.4 75.038,61.17 75.438,61.57 75.438,62.23 75.565,62.357 77.47,62.357 83.439,68.326 91.694,68.326
  Bottom Layer w0.5: v1(77.851,61.087) 77.878,61.087 79.131,59.834 C6.1
RESET: BT1.2 C11.1 R10.1 STM32.7 | length 70.8
  Top Layer w0.3: STM32.7 94.992,69.981 95.631,69.342
  Top Layer w0.5: BT1.2 v1(49.657,79.883) ; 95.631,69.342 96.185,69.342 96.947,68.58 v1(97.155,68.58)
  Bottom Layer w0.5: v1(49.657,79.883) 54.864,79.883 54.991,80.01 58.293,80.01 62.103,76.2 62.103,70.866 62.034,70.797 62.034,68.766 62.855,67.945 79.502,67.945 84.709,73.152 90.297,73.152 94.996,68.453 97.028,68.453 v1(97.155,68.58)
RXD2: LORA_8000M.3 STM32.22 | length 40.5
  Top Layer w0.3: STM32.22 101.17,80.998 101.346,81.174 101.346,82.042 103.378,84.074 103.378,84.836 v1(104.775,86.233)
  Bottom Layer w0.5: v1(104.775,86.233) 106.657,86.233 108.054,87.63 113.627,87.63 119.38,81.877 119.38,71.12 LORA_8000M.3
SCK: LORA_8000M.2 STM32.15 | length 25.6
  Top Layer w0.3: STM32.15 110.589,77.498 114.935,73.152 114.935,68.453 LORA_8000M.2
SCL: J1.1 R12.2 STM32.42 | length 66.2
  Top Layer w0.3: 69.977,86.741 70.014,86.778 v1(78.235,86.778) ; v1(79.756,75.692) 78.613,76.835 78.613,78.613 79.391,79.391 82.382,79.391 82.398,79.375 84.836,79.375 84.959,79.498 STM32.42
  Top Layer w0.5: J1.1 55.88,73.914 56.642,73.152 63.114,73.152 R12.2 63.246,81.153 64.262,82.169 64.4,82.169 v1(64.444,82.213) ; v1(67.096,84.73) 69.107,86.741 69.977,86.741
  Bottom Layer w0.3: v1(78.235,86.778) 79.114,85.899 79.114,84.854 79.319,84.649 80.132,84.649 80.132,79.441 79.505,78.814 79.505,77.301 79.505,76.353 79.57,76.287 79.57,75.878 v1(79.756,75.692)
  Bottom Layer w0.5: v1(64.444,82.213) 66.802,84.571 66.802,84.963 67.035,84.73 v1(67.096,84.73)
SDA: J1.2 R11.2 STM32.43 | length 65.4
  Top Layer w0.3: v1(81.851,75.42) 79.248,78.023 79.248,78.486 79.653,78.891 82.175,78.891 82.191,78.875 85.118,78.875 85.241,78.998 STM32.43
  Top Layer w0.5: J1.2 51.755,68.9 60.386,68.9 R11.2 59.602,69.816 59.566,69.816 59.302,70.08 59.302,70.116 58.42,70.998 v1(58.42,71.628) ; v1(60.579,74.676) 60.579,76.654 v1(62.161,78.236) ; v1(65.308,74.299) 65.372,74.235 65.372,70.999 v1(65.436,70.935)
  Bottom Layer w0.5: v1(58.42,71.628) 58.42,73.152 59.817,74.549 60.452,74.549 v1(60.579,74.676) ; v1(62.161,78.236) 63.623,78.236 65.308,76.551 v1(65.308,74.299) ; v1(65.436,70.935) 65.521,70.849 65.93,70.849 65.982,70.797 74.542,70.797 74.553,70.808 78.802,70.808 80.688,72.695 80.688,74.258 v1(81.851,75.42)
SWCLK: JLINK.2 STM32.37 | length 47.8
  Top Layer w0.3: JLINK.2 49.784,85.979 52.07,83.693 84.836,83.693 84.962,83.567 85.119,83.567 85.397,83.288 86.336,83.288 86.363,83.315 86.611,83.315 86.614,83.312 87.122,83.312 88.436,81.998 STM32.37
  Bottom Layer w0.5: JLINK.2 JLINK.2@49.784,91.313
SWIO: JLINK.3 STM32.34 | length 46.7
  Top Layer w0.3: v1(88.492,89.437) 92.992,84.937 STM32.34
  Top Layer w0.5: JLINK.3 53.975,89.408 67.056,89.408 67.183,89.281 77.343,89.281 79.375,91.313 85.471,91.313 85.471,90.764 v1(85.52,90.715)
  Bottom Layer w0.5: v1(85.52,90.715) 86.797,89.437 v1(88.492,89.437)
TXD2: LORA_8000M.4 STM32.21 | length 34.8
  Top Layer w0.3: STM32.21 101.805,80.498 101.981,80.674 101.981,81.915 v1(104.648,84.582)
  Bottom Layer w0.5: v1(104.648,84.582) 113.284,84.582 115.697,82.169 118.009,82.169 118.618,81.56 118.618,71.882 118.305,71.569 117.289,71.569 LORA_8000M.4
VBAT: STM32.1
pads on no net: Y1.2 Y1.3

## Polygon pours and split planes (outlines as drawn)
GND on Top Layer "GND_L01_P000" (solid, pour order 0): 42.799,123.952 cw(c43.18,123.952) 43.18,124.333 124.079,124.333 cw(c124.079,123.444) 124.968,123.444 124.968,44.323 cw(c124.206,44.323) 124.206,43.561 43.434,43.561 cw(c43.434,44.196) 42.799,44.196
GND on Bottom Layer "GND_L02_P001" (solid, pour order 1): 43.307,124.206 cw(c43.434,124.206) 43.434,124.333 124.206,124.333 cw(c124.206,123.698) 124.841,123.698 124.841,44.196 cw(c124.333,44.196) 124.333,43.688 43.434,43.688 cw(c43.434,44.196) 42.926,44.196 42.926,124.079 cw(c43.18,124.079) 43.18,124.333 43.434,124.333

## Keep-outs
Keep-Out Layer:
  the board outline again, w0.254

## Silkscreen, mask and mechanical layers (free items; w line width, h text height)
Top Overlay:
  text "17" at 107.315,116.332 h1
  text "45" at 107.061,113.538 h1
  text "29" at 107.315,110.998 h1
  text "28" at 107.188,108.458 h1
  text "GND" at 120.015,108.204 h1.5 r270
  text "27" at 107.188,106.045 h1
  text "26" at 107.315,103.505 h1
  text "25" at 107.188,101.092 h1
  text "46" at 107.188,98.298 h1
  text "SWCLK" at 48.895,92.837 h0.5
  text "SWIO" at 51.943,92.837 h0.5
  text "3V3" at 54.483,92.837 h0.5
  text "GND" at 46.355,92.71 h0.5
  text "GND" at 113.157,78.613 h0.7
  text "3V3" at 113.157,76.2 h0.7
  text "AUX" at 113.157,73.66 h0.7
  text "TX" at 113.03,70.739 h0.7
  text "RX" at 113.157,68.199 h0.7
  text "MD1" at 113.03,65.913 h0.7
  text "3V3" at 58.166,64.389 h0.8 r90
  text "MD0" at 112.903,63.373 h0.7
  text "5V" at 58.293,61.849 h0.8 r90
  text "5V" at 45.847,61.468 h1.2 r90
  text "5V" at 58.293,58.801 h0.8 r90
  text "3V3" at 45.72,56.388 h1.2 r90
  text "CONTROLER / AmazingTech" at 94.742,56.261 h1.2
  text "GND" at 58.166,55.626 h0.7 r90
  text "GND" at 58.166,53.086 h0.7 r90
  text "GND" at 45.466,50.8 h1.2 r90
  text "GND" at 58.166,50.546 h0.7 r90
  text "GND" at 108.331,48.133 h0.7
  text "RX" at 111.252,48.133 h0.7
  text "TX" at 113.538,48.006 h0.7
  text "5V" at 67.564,47.371 h0.7
  text "5V" at 69.977,47.371 h0.7
  text "PA15" at 72.009,47.371 h0.7
  text "PA3" at 75.057,47.371 h0.7
  text "PB4" at 77.597,47.371 h0.7
  text "PB5" at 80.264,47.371 h0.7
  text "GND" at 82.804,47.371 h0.7
  text "5V" at 87.757,47.371 h0.7
  text "PA0" at 90.043,47.371 h0.7
  text "PA1" at 92.837,47.371 h0.7
  text "PA2" at 95.25,47.371 h0.7
  text "PA3" at 97.917,47.371 h0.7
  text "PA11" at 100.457,47.371 h0.7
  text "5V" at 103.378,47.371 h0.7

## Text inside footprints (layer, text, board x,y; h text height)
BUZZER: Top Overlay "+" at 115.76,80.102 h1.27 r90; Top Overlay "-" at 115.76,94.365 h1.27 r90
DIP8: Top Overlay "ON" at 115.973,117.64 h1.02 r270; Top Component Outline "8" at 111.373,99.43 h1.02 r270; Top Component Outline "7" at 111.373,101.97 h1.02 r270; Top Component Outline "5" at 111.373,107.05 h1.02 r270; Top Component Outline "4" at 111.373,109.59 h1.02 r270; Top Component Outline "3" at 111.373,112.13 h1.02 r270; Top Component Outline "1" at 111.373,117.07 h1.02 r270; Top Component Outline "ON" at 115.973,117.64 h1.02 r270; Top Component Outline "2" at 111.373,114.67 h1.02 r270; Top Component Outline "6" at 111.373,104.51 h1.02 r270